# EAGLE board DorothiControllerOld (EAGLE 9.2.2)
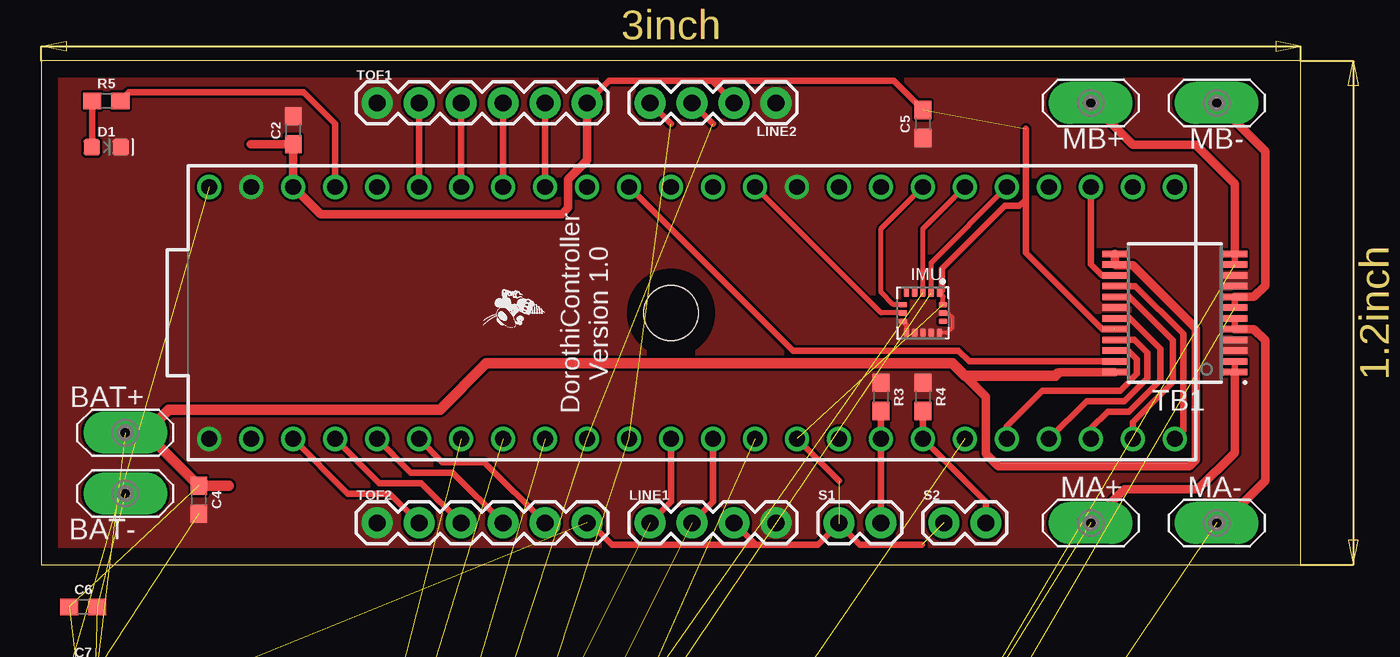
[diagram p0: board, top side]

Size 76.2 x 30.48 mm. Coordinates in mm from the lower left corner, seen from the top.
Outline: 0,0 76.2,0 76.2,30.48 0,30.48 0,0
Copper layers (1*16): Top 0.035mm / dielectric 1.5mm / Bottom 0.035mm
Design rules "default": minimum track width 6mil, minimum drill 0.35mm, track to track 6mil, track to pad 6mil, pad to pad 6mil, via to via 6mil, smd to smd 6mil, copper to edge 40mil, drill to drill 6mil, minimum pad ring 10mil, minimum via ring 8mil, stop-mask expansion 4mil, vias tented up to drill 0mil, thermal gap 10mil
Holes 3.3 mm at 38.1,15.24

## Footprints (pad centres in the part's own frame; a part is rotated, then mirrored left to right if it is on the bottom)
1X04 = drill 1.016 pad 1.88: 1 0,0; 2 2.54,0; 3 5.08,0; 4 7.62,0
WIRE_SOLPAD = drill 0.6 pad 2.54 long: P$1 0,0
0603 = smd 1.1 x 1: 1 -0.85,0; 2 0.85,0
0603-POLAR = smd 1.1 x 1: + 0.85,0; - -0.85,0
LED-0603 = smd 1 x 1: A -0.877,0; C 0.877,0
1X06 = drill 1.016 pad 1.88: 1 0,0; 2 2.54,0; 3 5.08,0; 4 7.62,0; 5 10.16,0; 6 12.7,0
PQFN50P300X300X86-16N = smd 0.51 x 0.35: 1 -1.21,1; 2 -1.21,0.5; 3 -1.21,0; 4 -1.21,-0.5; 5 -1.21,-1; 9 1.21,-1; 10 1.21,-0.5; 11 1.21,0; 12 1.21,0.5; 13 1.21,1 | smd 0.35 x 0.51: 6 -0.5,-1.21; 7 0,-1.21; 8 0.5,-1.21; 14 0.5,1.21; 15 0,1.21; 16 -0.5,1.21
TEENSY_3.6_DIL = drill 0.965: 0 -7.62,25.4; 1 -7.62,22.86; 2 -7.62,20.32; 3 -7.62,17.78; 3.3V 7.62,22.86; 3.3V3 -7.62,-7.62; 4 -7.62,15.24; 5 -7.62,12.7; 6 -7.62,10.16; 7 -7.62,7.62; 8 -7.62,5.08; 9 -7.62,2.54; 10 -7.62,0; 11 -7.62,-2.54; 12 -7.62,-5.08; 13 7.62,-5.08; 14/A0 7.62,-2.54; 15/A1 7.62,0; 16/A2 7.62,2.54; 17/A3 7.62,5.08; 18/A4 7.62,7.62; 19/A5 7.62,10.16; 20/A6 7.62,12.7; 21/A7 7.62,15.24; 22/A8 7.62,17.78; 23/A9 7.62,20.32; 24 -7.62,-10.16; 25 -7.62,-12.7; 26 -7.62,-15.24; 27 -7.62,-17.78; 28 -7.62,-20.32; 29 -7.62,-22.86; 30 -7.62,-25.4; 31/A12 -7.62,-27.94; 32/A13 -7.62,-30.48; 33/A14 7.62,-30.48; 34/A15 7.62,-27.94; 35/A16 7.62,-25.4; 36/A17 7.62,-22.86; 37/A18 7.62,-20.32; 38/A19 7.62,-17.78; 39/A20 7.62,-15.24; A21 7.62,-12.7; A22 7.62,-10.16; AGND 7.62,25.4; GND -7.62,27.94; GND1 7.62,-7.62; VIN 7.62,27.94
1X02 = drill 1.016 pad 1.88: 1 0,0; 2 2.54,0
SWITCH_SPDT_PTH_11.6X4.0MM = drill 1.016 pad 1.88: 1 0,2.54; 2 0,0; 3 0,-2.54
TACTILE_SWITCH_PTH_6.0MM = drill 1.016 pad 1.88: 1 -3.251,2.261; 2 3.251,2.261; 3 -3.251,-2.261; 4 3.251,-2.261
SOP65P760X160-24N = smd 1.5 x 0.4: 1 -3.625,3.575; 2 -3.625,2.925; 3 -3.625,2.275; 4 -3.625,1.625; 5 -3.625,0.975; 6 -3.625,0.325; 7 -3.625,-0.325; 8 -3.625,-0.975; 9 -3.625,-1.625; 10 -3.625,-2.275; 11 -3.625,-2.925; 12 -3.625,-3.575; 13 3.625,-3.575; 14 3.625,-2.925; 15 3.625,-2.275; 16 3.625,-1.625; 17 3.625,-0.975; 18 3.625,-0.325; 19 3.625,0.325; 20 3.625,0.975; 21 3.625,1.625; 22 3.625,2.275; 23 3.625,2.925; 24 3.625,3.575

## Placement (x,y rotation side)
5V_REG  [1X04]  2.54,-30.48 0 top  (outside the outline)
BAT+  24_SOLPAD  [WIRE_SOLPAD]  5.08,8 180 top
BAT-  24_SOLPAD  [WIRE_SOLPAD]  5.08,4.32 180 top
C1  10uF  [0603]  2.54,-21.59 0 top  (outside the outline)
C2  0.1uF  [0603]  15.24,26.29 90 top
C3  0.1uF  [0603]  2.54,-34.29 0 top  (outside the outline)
C4  0.1uF  [0603]  9.53,3.94 270 top
C5  0.1uF  [0603]  53.34,26.67 270 top
C6  1.0uF  [0603]  2.54,-2.54 0 top
C7  0.1uF  [0603]  2.54,-6.35 0 top  (outside the outline)
C8  0.1uF  [0603]  2.54,-10.16 0 top  (outside the outline)
C9  0.1uF  [0603]  2.54,-73.66 0 top  (outside the outline)
C10  10uF  [0603]  2.54,-38.1 0 top  (outside the outline)
C11  1.0uF  [0603]  2.54,-41.91 0 top  (outside the outline)
C13  10uF  [0603-POLAR]  2.54,-49.53 0 top  (outside the outline)
C14  10uF  [0603-POLAR]  2.54,-53.34 0 top  (outside the outline)
D1  [LED-0603]  3.94,25.27 0 top
D2  [LED-0603]  2.54,-13.97 0 top  (outside the outline)
ENCODERA  [1X06]  -5.08,-91.44 0 top  (outside the outline)
ENCODERB  [1X06]  -5.08,-95.25 0 top  (outside the outline)
IMU  LSM6DS33TR  [PQFN50P300X300X86-16N]  53.34,15.24 270 top
LINE1  [1X04]  36.83,2.54 0 top
LINE2  [1X04]  44.45,27.94 180 top
LINE3  [1X04]  2.54,-66.04 0 top  (outside the outline)
LINE4  [1X04]  2.54,-69.85 0 top  (outside the outline)
MA+  24_SOLPAD  [WIRE_SOLPAD]  63.5,2.54 180 top
MA-  24_SOLPAD  [WIRE_SOLPAD]  71.12,2.54 180 top
MB+  24_SOLPAD  [WIRE_SOLPAD]  63.5,27.94 180 top
MB-  24_SOLPAD  [WIRE_SOLPAD]  71.12,27.94 180 top
MCU  TEENSY_3.6_DIL  [TEENSY_3.6_DIL]  38.1,15.24 90 top
R1  4.7k  [0603]  2.54,-57.15 0 top  (outside the outline)
R2  4.7k  [0603]  2.54,-60.96 0 top  (outside the outline)
R3  10k  [0603]  50.8,10.16 270 top
R4  10k  [0603]  53.34,10.16 270 top
R5  10k  [0603]  3.94,28.07 0 top
R6  10k  [0603]  2.54,-17.78 0 top  (outside the outline)
R7  1k  [0603]  -5.08,-86.36 0 top  (outside the outline)
S1  [1X02]  48.26,2.54 0 top
S2  [1X02]  54.61,2.54 0 top
S3  ONOFF  [SWITCH_SPDT_PTH_11.6X4.0MM]  -3.81,-68.58 0 top  (outside the outline)
S4  START  [TACTILE_SWITCH_PTH_6.0MM]  -2.54,-80.01 0 top  (outside the outline)
TB1  TB6612FNG  [SOP65P760X160-24N]  68.58,15.24 180 top
TOF1  VL53L0X  [1X06]  20.32,27.94 0 top
TOF2  VL53L0X  [1X06]  20.32,2.54 0 top
U$2  ROBOBUZZ0.2X  [ROBOBUZZ_0.2X]  30.48,15.24 90 top

## Library data of the parts
5V_REG LINE1-LINE4 = SparkFun-Connectors; PROD_ID: CONN-09696
BAT+ BAT- MA+ MA- MB+ MB- = nickZhang
C1 C10 = SparkFun-Capacitors; PROD_ID: CAP-11015
C2 C4 C5 C8 C9 = SparkFun-Capacitors; PROD_ID: CAP-08604
C3 C7 = SparkFun-Capacitors; PROD_ID: CAP-00810
C6 C11 = SparkFun-Capacitors; PROD_ID: CAP-00868
C13 C14 = SparkFun-Capacitors; PROD_ID: CAP-13210
D1 D2 = SparkFun-LED
ENCODERA ENCODERB TOF1 TOF2 = SparkFun-Connectors; PROD_ID: CONN-08437
IMU = LSM6DS33TR; AVAILABILITY: Unavailable; DESCRIPTION: Integrated Circuit, Misc s 3d Accelerometer And Gyro Lsm6ds3; MF: STMicroelectronics; MP: LSM6DS33TR; PACKAGE: LGA-16 STMicroelectronics; PRICE: None
MCU = Teensy_3_and_LC_Series_Boards_v1.4
R1 R2 = SparkFun-Resistors; PROD_ID: RES-07857
R3-R6 = SparkFun-Resistors; PROD_ID: RES-00824
R7 = SparkFun-Resistors; PROD_ID: RES-07856
S1 S2 = SparkFun-Connectors
S3 = SparkFun-Switches; PROD_ID: SWCH-08261; SF_SKU: COM-00102
S4 = SparkFun-Switches; PROD_ID: SWCH-08441; SF_SKU: COM-00097
TB1 = TB6612FNG; AVAILABILITY: Unavailable; DESCRIPTION: Stepping Motor Driver Ic Unipolor Copper Wire 8; MF: Toshiba; MP: TB6612FNG_O,C,8,EL; PACKAGE: SSOP-24 Toshiba; PRICE: None
U$2 = RoboJackets-Aesthetics

## Nets
5V_OUT: 5V_REG.4 C3.1 C7.1 C11.1 MCU.VIN R6.2
+3V3: C1.1 C2.1 C5.1 C8.1 C9.1 ENCODERA.4 ENCODERB.4 IMU.1 IMU.16 LINE1.3 LINE2.2 LINE3.3 LINE4.2 MCU.3.3V MCU.3.3V3 R1.2 R2.2 S1.1 S2.1 S4.1 TB1.20 TOF1.6 TOF2.6
+12V: 5V_REG.2 C4.1 C6.1 C10.1 C13.+ C14.+ S3.2 TB1.13 TB1.14 TB1.24
-VIN: 5V_REG.1 BAT-.P$1 C6.2 C10.2
BTN1: MCU.25 R3.2 S1.2
BTN2: MCU.26 R4.2 S2.2
ENCA_OUTA: ENCODERA.3 MCU.5
ENCA_OUTB: ENCODERA.2 MCU.6
ENCB_OUTA: ENCODERB.3 MCU.7
ENCB_OUTB: ENCODERB.2 MCU.12
GND: 5V_REG.3 C1.2 C2.2 C3.2 C4.2 C5.2 C7.2 C8.2 C9.2 C11.2 C13.- C14.- D1.C D2.C ENCODERA.1 ENCODERB.1 IMU.8 IMU.9 IMU.10 IMU.11 IMU.12 IMU.13 IMU.15 LINE1.4 LINE2.1 LINE3.4 LINE4.1 MCU.AGND MCU.GND MCU.GND1 R3.1 R4.1 R7.1 TB1.3 TB1.4 TB1.9 TB1.10 TB1.18 TOF1.1 TOF2.1
IMU_INT1: IMU.7 MCU.13
IMU_INT2: IMU.6 MCU.39/A20
IMU_SCL: IMU.2 MCU.37/A18 R2.1
IMU_SDA: IMU.3 MCU.38/A19 R1.1
INDICATOR: MCU.23/A9 R5.2
LINE1_RS1: LINE1.1 LINE3.1 MCU.10
LINE1_RS2: LINE1.2 LINE3.2 MCU.11
LINE2_RS1: LINE2.3 LINE4.3 MCU.8
LINE2_RS2: LINE2.4 LINE4.4 MCU.9
M_AIN1: MCU.29 TB1.21
M_AIN2: MCU.28 TB1.22
M_BIN1: MCU.31/A12 TB1.17
M_BIN2: MCU.32/A13 TB1.16
M_PWMA: MCU.16/A2 TB1.23
M_PWMB: MCU.35/A16 TB1.15
M_STBY: MCU.30 TB1.19
MA+: ENCODERA.5 MA+.P$1 TB1.1 TB1.2
MA-: ENCODERA.6 MA-.P$1 TB1.5 TB1.6
MB+: ENCODERB.5 MB+.P$1 TB1.11 TB1.12
MB-: ENCODERB.6 MB-.P$1 TB1.7 TB1.8
N$1: BAT+.P$1 S3.1
N$5: D1.A R5.1
N$7: D2.A R6.1
START: MCU.27 R7.2 S4.3
TOF1_READY: MCU.20/A6 TOF1.3
TOF1_SCL: MCU.19/A5 TOF1.4
TOF1_SDA: MCU.18/A4 TOF1.5
TOF1_SHDN: MCU.21/A7 TOF1.2
TOF2_READY: MCU.2 TOF2.3
TOF2_SCL: MCU.3 TOF2.4
TOF2_SDA: MCU.4 TOF2.5
TOF2_SHDN: MCU.1 TOF2.2

## Tracks (layer width: path | path; a pad name or v marks a point on that pad's centre or on a via)
5V_OUT  (5 unrouted)
+3V3  (16 unrouted)
  Top 0.305: IMU.16 54.55,16.24 IMU.1
  Top 0.33: IMU.1 54.48,16.59
  Top 0.381: 48.26,5.08 MCU.3.3V3 | 53.28,1.21 49.53,1.21 48.26,2.48 46.99,1.21 43.18,1.21 | TOF2.6 33.21,2.54 34.54,1.21 43.18,1.21 | TOF1.6 34.35,29.27 40.58,29.27 | 40.58,29.27 LINE2.2 | 59.56,22.1 59.18,21.72 58.29,21.72 54.48,17.91 54.48,16.59 | 59.56,26.38 59.56,22.1 | 64.94,14.24 64.19,14.24 59.56,18.87 59.56,22.1 | LINE1.3 43.18,1.27 43.18,1.21 | C5.1 51.59,29.27 40.58,29.27
  Top 0.508: TOF1.6 33.02,24.48 31.88,23.33 31.88,21.59 31.5,21.21 16.89,21.21 MCU.3.3V C2.1 12.66,25.44
+12V  (6 unrouted)
  Top 0.508: TB1.13 TB1.14 65,18.12 66.03,18.12 69.85,14.31 69.85,6.35 69.47,5.97 57.91,5.97 57.15,6.73 57.15,10.16 55.88,11.43 | TB1.24 61.58,11.66 61.47,11.56
  Top 0.635: 11.34,4.79 C4.1 6.31,8 7.71,9.4 24.13,9.4 26.92,12.19 55.12,12.19 55.88,11.43 61.34,11.43 61.47,11.56
-VIN  (3 unrouted)
BTN1
  Top 0.381: S1.2 MCU.25 R3.2
BTN2
  Top 0.381: S2.2 57.15,3.81 MCU.26 R4.2
ENCA_OUTA  (1 unrouted)
ENCA_OUTB  (1 unrouted)
ENCB_OUTA  (1 unrouted)
ENCB_OUTB  (1 unrouted)
GND  (15 unrouted)
  Top 0.254: IMU.15 54.6,15.19 54.9,15.19 55.12,14.97 55.12,14.35 54.8,14.03 IMU.13
  Top 0.305: IMU.8 52.34,14.53 IMU.9
  pour Top (no thermals): 0,0 0,30.48 76.2,30.48 76.2,0
IMU_INT1
  Top 0.305: IMU.7 50.8,15.24 MCU.13
IMU_INT2
  Top 0.305: IMU.6 51.57,15.74 50.8,16.51 50.8,20.32 MCU.39/A20
IMU_SCL  (1 unrouted)
  Top 0.305: IMU.2 53.84,18.28 MCU.37/A18
IMU_SDA  (1 unrouted)
  Top 0.305: IMU.3 53.34,20.32 MCU.38/A19
INDICATOR
  Top 0.381: MCU.23/A9 17.78,26.67 15.88,28.57 5.29,28.57 R5.2
LINE1_RS1  (1 unrouted)
  Top 0.381: LINE1.1 38.1,3.81 MCU.10
LINE1_RS2  (1 unrouted)
  Top 0.381: LINE1.2 40.64,3.81 MCU.11
LINE2_RS1  (2 unrouted)
  Top 0.381: 40.64,26.67 LINE2.3
LINE2_RS2  (2 unrouted)
  Top 0.381: 38.1,26.67 LINE2.4
M_AIN1
  Top 0.381: TB1.21 66.14,13.62 66.93,12.83 66.93,11.3 65.53,9.91 63.25,9.91 MCU.29
M_AIN2
  Top 0.381: TB1.22 65.78,12.96 66.29,12.45 66.29,11.56 65.28,10.54 60.58,10.54 58.42,8.38 MCU.28
M_BIN1
  Top 0.381: TB1.17 65.83,16.21 68.45,13.59 68.45,11.05 66.04,8.64 MCU.31/A12
M_BIN2
  Top 0.381: TB1.16 66.19,16.86 69.09,13.97 69.09,8.13 MCU.32/A13
M_PWMA
  Top 0.381: TB1.23 56.14,12.31 55.5,12.95 45.47,12.95 MCU.16/A2
M_PWMB
  Top 0.381: TB1.15 64.16,17.52 63.5,18.18 MCU.35/A16
M_STBY
  Top 0.381: TB1.19 65.86,14.91 67.69,13.08 67.69,11.18 65.79,9.27 64.52,9.27 63.5,8.26 MCU.30
MA+  (1 unrouted)
  Top 0.381: TB1.1 TB1.2
  Top 0.508: TB1.1 72.2,6.8 69.98,4.57 65.53,4.57 MA+.P$1
MA-  (1 unrouted)
  Top 0.381: TB1.5 TB1.6
  Top 0.508: TB1.5 73.36,14.27 74.04,13.59 74.04,5.08 71.5,2.54 MA-.P$1
MB+  (1 unrouted)
  Top 0.381: TB1.11 TB1.12
  Top 0.508: TB1.12 72.2,23.05 69.85,25.4 66.04,25.4 MB+.P$1
MB-  (1 unrouted)
  Top 0.381: TB1.7 TB1.8
  Top 0.508: MB-.P$1 74.04,25.02 74.04,16.89 73.36,16.21 TB1.8
N$1  (1 unrouted)
N$5
  Top 0.381: R5.1 3.09,25.3 D1.A
N$7  (1 unrouted)
START  (2 unrouted)
TOF1_READY
  Top 0.381: MCU.20/A6 TOF1.3
TOF1_SCL
  Top 0.381: MCU.19/A5 TOF1.4
TOF1_SDA
  Top 0.381: MCU.18/A4 TOF1.5
TOF1_SHDN
  Top 0.381: MCU.21/A7 TOF1.2
TOF2_READY
  Top 0.381: TOF2.3 22.99,4.95 20.45,4.95 MCU.2
TOF2_SCL
  Top 0.381: TOF2.4 24.89,5.59 22.35,5.59 MCU.3
TOF2_SDA
  Top 0.381: TOF2.5 26.8,6.22 24.26,6.22 MCU.4
TOF2_SHDN
  Top 0.381: TOF2.2 21.08,4.32 18.54,4.32 MCU.1

## Text on the board
tPlace: DorothiController / Version 1.0